# Altium PCB PCB2.PcbDoc
Units mm, origin at the board's own origin, x right, y up, seen from the top; angles counter-clockwise.
Board outline 50.13 x 61.13 mm, 2 copper layers (Top Layer, Bottom Layer); 14 components, 35 nets, 84 pads, 0 vias.
Unrouted connection lines stored in the file: 39.
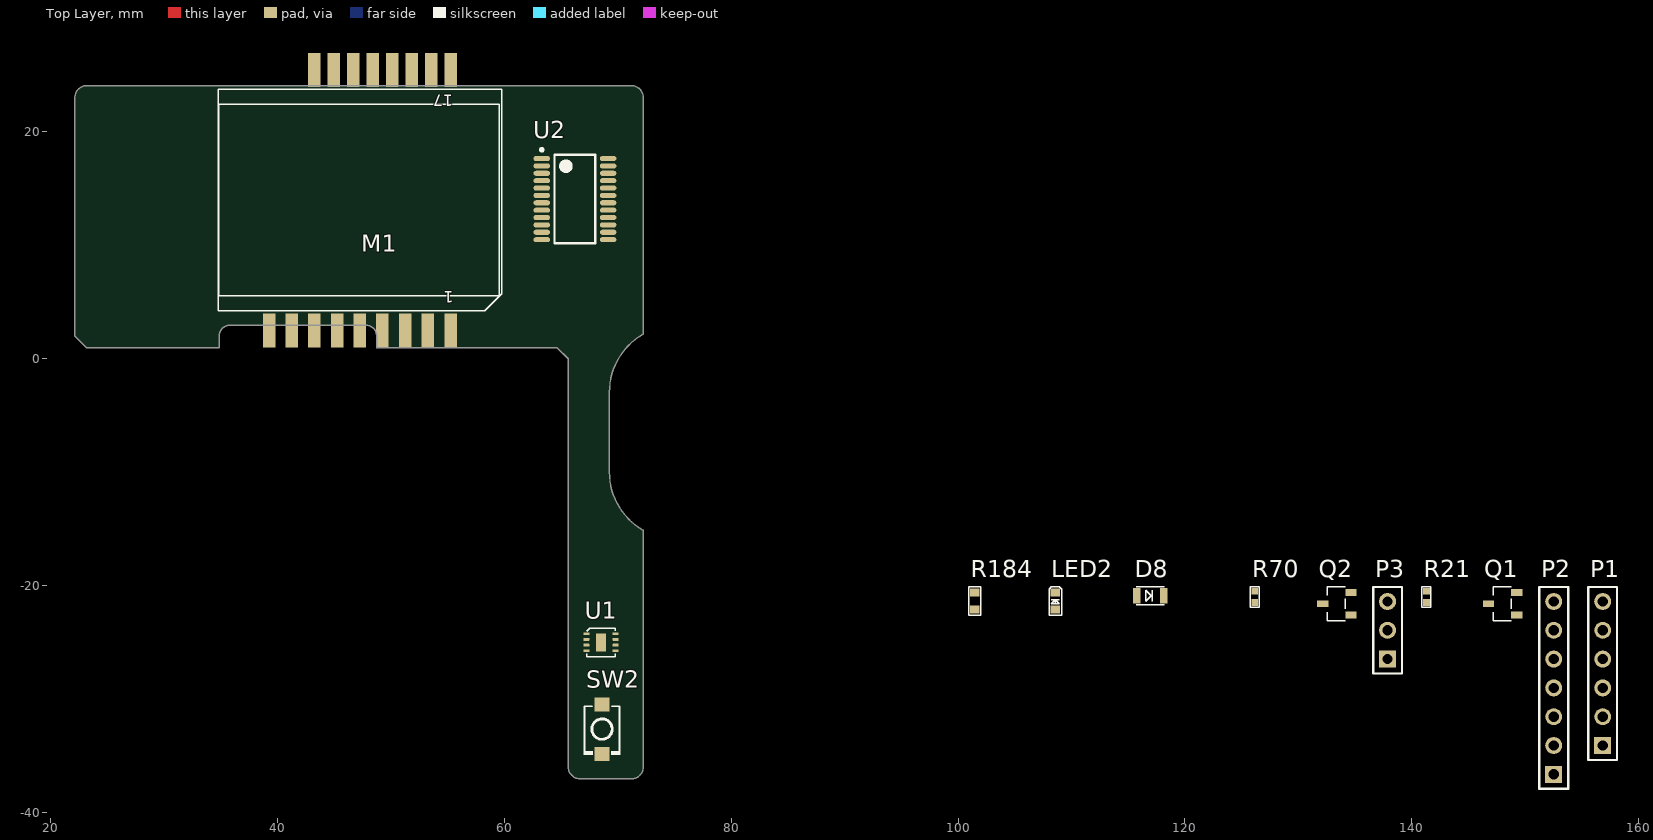
[diagram p0: Top Layer view]
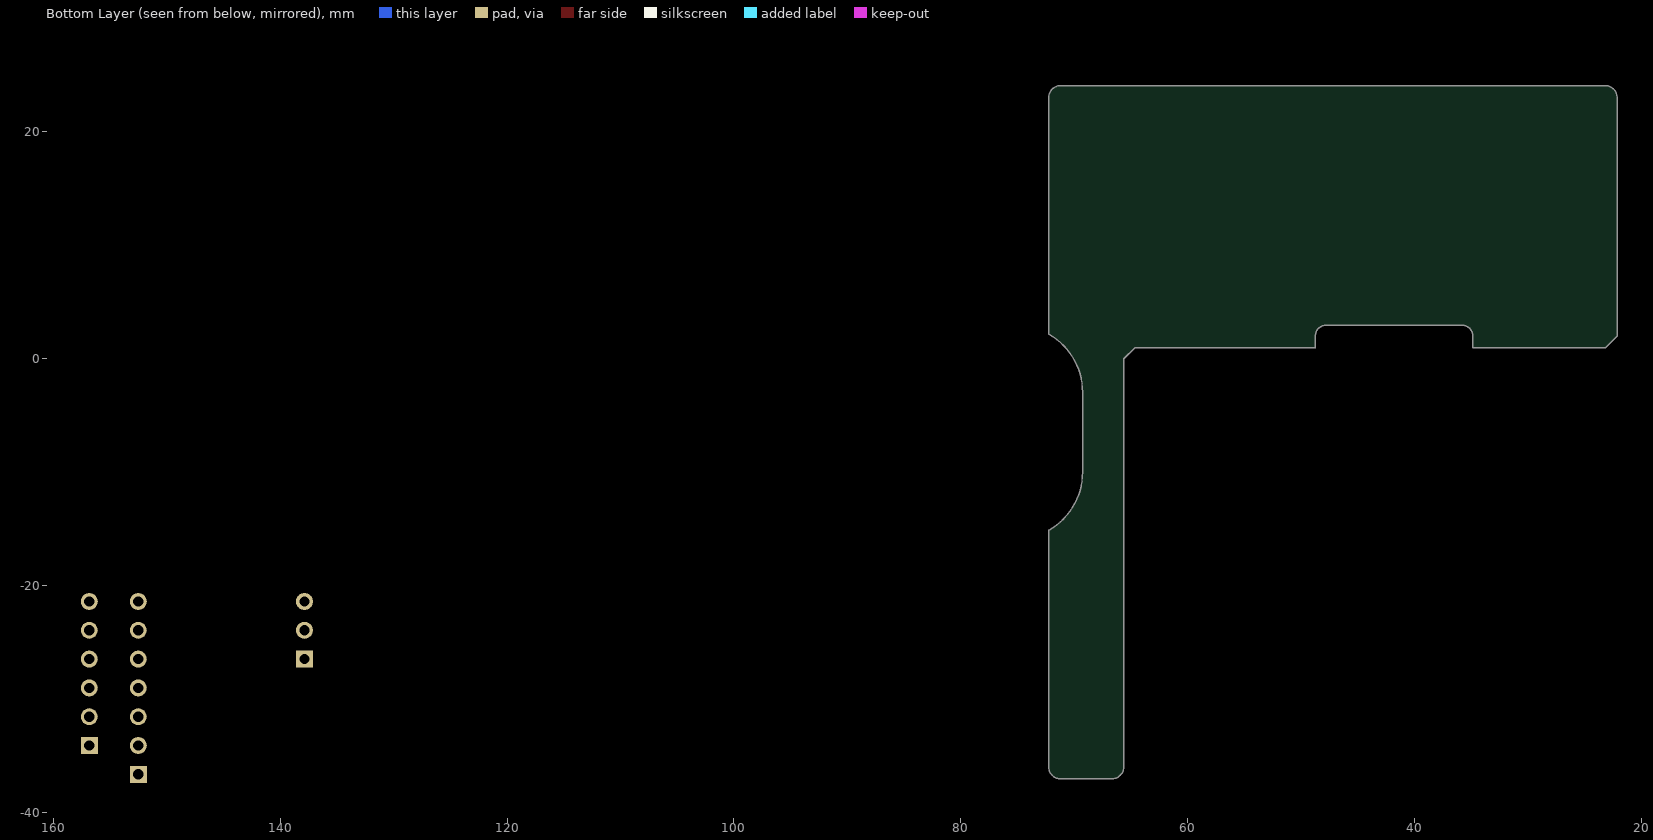
[diagram p1: Bottom Layer view, seen from below]

## Layer stack, top to bottom
Top Layer: signal copper 0.0356
Dielectric: dielectric 0.32, FR-4, Dk 4.8
Bottom Layer: signal copper 0.0356

## Board outline
23.14,0.947 ccw(c23.187,0.991) 23.189,0.927 34.784,0.927 ccw(c34.787,0.991) 34.851,0.991 34.851,1.991 cw(c35.787,1.991) 35.785,2.927 cw(c35.787,1.991) 35.787,2.927 47.787,2.927 cw(c47.787,1.991) 47.789,2.927 cw(c47.787,2.991) 47.784,2.927 47.789,2.927 cw(c47.787,1.991) 48.723,1.991 48.723,0.991 ccw(c48.787,0.991) 48.789,0.927 64.66,0.927 65.623,-0.036 65.623,-36.009 ccw(c66.687,-36.009) 66.684,-37.073 ccw(c66.687,-36.009) 66.687,-37.073 71.187,-37.073 ccw(c71.187,-36.009) 71.189,-37.073 ccw(c71.187,-36.009) 72.251,-36.009 72.251,-15.205 ccw(c72.187,-15.205) 72.218,-15.15 ccw(c75.187,-10.009) 72.219,-15.15 72.218,-15.15 cw(c75.187,-10.009) 69.251,-10.009 69.251,-3.009 cw(c75.187,-3.009) 72.217,2.131 ccw(c72.187,2.187) 72.251,2.187 72.251,22.991 ccw(c71.187,22.991) 71.187,24.055 23.187,24.055 ccw(c23.187,22.991) 22.123,22.991 22.123,1.991 ccw(c22.187,1.991) 22.143,1.944 22.142,1.946

## Design rules (kind name [scope] priority, off if disabled: settings)
Clearance [All] p1: gap=0.254
PolygonConnect [All] p1: connectstyle=Relief reliefconductorwidth=0.254 reliefentries=4 polygonreliefangle="90 Angle"
RoutingVias [All] p1: holewidth=0.711 width=1.27 viastyle="Through Hole" minholewidth=0.711 minwidth=1.27 maxholewidth=0.711 maxwidth=1.27
SilkscreenOverComponentPads [All] p1: minsilkscreentomaskgap=0.254
SolderMaskExpansion [All] p1: expansion=0.102
Width [All] p1: maxlimit=0.254 minlimit=0.254 preferedwidth=0.254
27 further rules are at their usual default settings.

## Components (designator, comment, footprint, x,y, rotation, side; value= is the part's Value field where it differs from the comment)
D8 "CESDB5V0D3" SOD323 115.748,-20.93 r0 top
LED2 "5V" 0603LED 108.585,-22.149 r90 top
M1 "YR-90823A" YR-90823A 55.245,2.438 r180 top
P1 "Header 6" HDR1X6 156.845,-34.138 r90 top
P2 "Header 7" HDR1X7 152.527,-36.678 r90 top
P3 "Header 3" HDR1X3 137.871,-26.518 r90 top
Q1 "NPN BCE_2" SOT23-3 149.276,-22.631 r0 top
Q2 "NPN BCE_2" SOT23-3 134.645,-22.631 r0 top
R21 "RESISTOR_0" 0402R 141.3,-21.539 r90 top
R70 "RESISTOR_0" 0402R 126.162,-21.539 r90 top
R184 "1K" 0603R 101.473,-22.149 r90 top
SW2 "SW PUSHBUTTON" SW-SMD_L3.9-W3.0-P4.45 68.605,-32.69 r270 top
U1 "SHT30" sh30 68.504,-25.044 r0 top
U2 "HT16C21A-24SOP" SOP65P640X265-24N 66.218,14.046 r0 top

## Footprints (in the part's own frame and the unit in brackets; to place one, negate y for a bottom-side part, rotate by r counter-clockwise, add the part's x,y. Pads: shape width x height; smd on the part's side, far side on the other; paste and mask are expansions set on the pad)
0402R [mm]
  rect 0.6x0.6 smd: 1(0,0) 2(1,0)
  silkscreen extent -0.4,-0.4 1.4,0.4
0603LED [mm]
  rect 0.7x0.85 smd: 1(0,0) 2(1.5,0)
  silkscreen extent -0.5,-0.55 2,0.55
0603R [mm]
  rect 0.7x0.85 smd: 1(0,0) 2(1.5,0)
  silkscreen extent -0.5,-0.55 2,0.55
HDR1X3 [mm] "Connector; Header; 3 Position"
  rect 1.5x1.5 hole 0.9: 1(0,0)
  round 1.5 hole 0.9: 2(2.54,0) 3(5.08,0)
  silkscreen extent -1.27,-1.27 6.35,1.27
HDR1X6 [mm] "Connector; Header; 6 Position"
  rect 1.5x1.5 hole 0.9: 1(0,0)
  round 1.5 hole 0.9: 2(2.54,0) 3(5.08,0) 4(7.62,0) 5(10.16,0) 6(12.7,0)
  silkscreen extent -1.27,-1.27 13.97,1.27
HDR1X7 [mm] "Connector; Header; 7 Position"
  rect 1.5x1.5 hole 0.9: 1(0,0)
  round 1.5 hole 0.9: 2(2.54,0) 3(5.08,0) 4(7.62,0) 5(10.16,0) 6(12.7,0) 7(15.24,0)
  silkscreen extent -1.27,-1.27 16.51,1.27
sh30 [mm]
  rrect50% 0.55x0.25 smd: 1(-1.275,0.762) 2(-1.275,0.262) 3(-1.275,-0.238) 4(-1.275,-0.738) 5(1.3,-0.738) 6(1.3,-0.238) 7(1.3,0.262) 8(1.3,0.762)
  rect 0.9x1.6 smd: 9(0,0)
  silkscreen extent -1.25,-1.25 1.25,1.25
SOD323 [mm]
  rect 0.65x1.35 smd: 1(0,0) 2(2.4,0)
  silkscreen extent -0.03,-0.8 2.44,0.8
SOP65P640X265-24N [mm] "SOP, 24-Leads, Body 7.8x4.4mm (max), Pitch 0.65mm, IPC Medium Density"
  oval 1.45x0.45 smd: 1(-2.925,3.575) 2(-2.925,2.925) 3(-2.925,2.275) 4(-2.925,1.625) 5(-2.925,0.975) 6(-2.925,0.325) 7(-2.925,-0.325) 8(-2.925,-0.975) 9(-2.925,-1.625) 10(-2.925,-2.275) 11(-2.925,-2.925) 12(-2.925,-3.575) 13(2.925,-3.575) 14(2.925,-2.925) 15(2.925,-2.275) 16(2.925,-1.625) 17(2.925,-0.975) 18(2.925,-0.325) 19(2.925,0.325) 20(2.925,0.975) 21(2.925,1.625) 22(2.925,2.275) 23(2.925,2.925) 24(2.925,3.575)
  silkscreen extent -3.05,-3.9 1.8,4.47, body extent -2.2,-3.9 2.2,3.9, height 2.65
SOT23-3 [mm]
  rect 1x0.6 smd: 1(0,0) 2(0,2) 3(-2.5,1)
  silkscreen extent -2.1,-0.5 -0.5,2.5
SW-SMD_L3.9-W3.0-P4.45 [mm]
  rect 1.23x1.36 smd: 1(-2.185,0) 2(2.185,0)
  silkscreen extent -2.03,-1.62 2.25,1.62
YR-90823A [mm]
  rect 1.1x3 smd: 1(0,0) 2(2,0) 3(4,0) 4(6,0) 5(8,0) 6(10,0) 7(12,0) 8(14,0) 9(16,0) 10(12,-23) 11(10.286,-23) 12(8.571,-23) 13(6.857,-23) 14(5.143,-23) 15(3.429,-23) 16(1.714,-23) 17(0,-23)
  silkscreen extent -4.5,-21.29 20.5,-1.75

## Part data
D8: library part "DIODE S", "Schottky Diode"
LED2: library part LED
P1: "Header, 6-Pin"
P2: "Header, 7-Pin"
P3: "Header, 3-Pin"
R184: library part R, "R"

## Nets (pads, with @x,y where several pads share a name; then routed paths per layer and width w, separated by ;. In a path a pad name is that pad's centre, name@x,y a point inside that pad or via, vN(x,y) a via of type N, cw(c..) or ccw(c..) an arc to the next point about the centre after c; other vN are vias at no path point)
COM0: M1.1 U2.5
COM1: M1.2 U2.6
COM2: M1.3 U2.7
COM3: M1.4 U2.8
DTR: P1.3 Q2.2 R21.1
EN: P3.3 Q1.3
GND: D8.1 LED2.2 P1.6 P2.2 P3.2 SW2.1 U1.7 U1.8 U2.4
I2C_SCL: P2.4 U1.4
I2C_SDA: P2.3 U1.1
IO0: P3.1 Q2.3
KEY: P2.7 R70.2
LCD_I2C_SCL: P2.6
LCD_I2C_SDA: P2.5
NetD8_2: D8.2 R70.1 SW2.2
NetLED2_1: LED2.1 R184.1
NetQ1_1: Q1.1 R21.2
NetQ2_1: Q2.1
RTS: Q1.2
RXD0: P1.2
SEG1: M1.5 U2.9
SEG2: M1.6 U2.10
SEG3: M1.7 U2.11
SEG4: M1.8 U2.12
SEG5: M1.9 U2.13
SEG6: M1.10 U2.14
SEG7: M1.11 U2.15
SEG8: M1.12 U2.16
SEG9: M1.13 U2.17
SEG10: M1.14 U2.18
SEG11: M1.15 U2.19
SEG12: M1.16 U2.20
SEG13: M1.17 U2.21
TXD0: P1.1
VBUS: P1.5
VDD33: P2.1 R184.2 U1.5 U2.1
pads on no net: P1.4 U1.2 U1.3 U1.6 U1.9 U2.2 U2.3 U2.22 U2.23 U2.24

## Silkscreen, mask and mechanical layers (free items; w line width, h text height)
Top Overlay:
  lines w0.127: 34.817,5.521 34.817,22.421 59.557,22.421 59.557,5.521 34.817,5.521
Mechanical 1:
  drawing of 205 lines, arcs and shapes, not listed
  text "50.00" at 49.516,183.338 h2.5
  text "1.50" at 131.17,177.43 h2.5
  text "24.74" at 49.016,176.639 h2.5
  text "16.90" at 29.7,158.695 h2.5
  text "23.00" at 13.797,157.215 h2.5
  text "61.00" at 84.642,138.215 h2.5
  text "1.60" at 134.268,99.839 h2.5
  text "4.60" at 18.557,61.454 h2.5
  text "50.00" at 43.687,37.365 h2.5
  text "24.74" at 43.187,30.665 h2.5
  text "16.90" at 23.87,12.721 h2.5
  text "23.00" at 7.968,11.241 h2.5
  text "61.00" at 78.813,-7.759 h2.5
Mechanical 22:
  lines w0.127: 40.646,67.803 40.646,67.803 ; 40.646,67.803 40.646,69.303 ; 40.646,67.803 65.386,67.803 ; 40.646,69.303 40.646,69.303 ; 40.646,69.303 65.386,69.303 ; 65.386,67.803 65.386,67.803 ; 65.386,67.803 65.386,69.303 ; 65.386,69.303 65.386,69.303 ; 264.387,153.249 276.337,160.148 ; 264.387,153.249 264.387,154.474 ; 264.387,153.249 281.881,143.149 ; 264.387,154.474 276.337,161.373 ; 264.387,154.474 281.881,144.374 ; 276.337,160.148 276.337,161.373 ; 276.337,160.148 293.831,150.048 ; 276.337,161.373 293.831,151.273 ; 281.881,143.149 293.831,150.048 ; 281.881,143.149 281.881,144.374 ; 281.881,144.374 293.831,151.273 ; 293.831,150.048 293.831,151.273 ; 40.646,151.495 40.646,168.395 65.386,168.395 65.386,151.495 40.646,151.495 ; 125.579,151.495 125.58,168.395 127.08,168.395 127.079,151.495 125.579,151.495
Mechanical 24:
  lines w0.127: 29.016,64.703 29.016,66.303 ; 29.016,169.965 29.016,169.965 ; 40.616,64.703 40.616,66.303 ; 41.616,64.703 41.616,66.303 ; 53.616,64.703 53.616,66.303 ; 54.616,64.703 54.616,66.303 ; 70.516,64.703 70.516,66.303 ; 71.516,66.303 71.516,66.304 71.516,64.704 ; 72.516,64.704 72.516,66.304 ; 75.016,66.304 75.016,64.703 78.016,64.703 78.016,64.704 ; 77.016,64.703 77.016,64.704 77.016,66.304 ; 77.016,169.965 77.016,169.965 ; 128.578,109.965 130.178,109.965 ; 128.579,130.769 130.179,130.769 ; 128.579,135.965 130.179,135.965 ; 128.579,142.965 130.179,142.965 ; 128.579,145.965 130.179,145.965 ; 128.579,146.965 130.179,146.965 ; 128.579,147.965 130.179,147.965 ; 128.579,148.161 130.179,148.161 ; 128.579,148.965 130.179,148.965 ; 128.58,168.965 130.18,168.965 ; 252.96,154.433 267.809,163.006 267.809,164.312 252.96,155.739 252.96,153.616 261.162,148.881 ; 252.96,154.923 261.162,150.187 ; 256.556,120.753 256.556,122.059 ; 256.849,121.161 282.305,135.858 282.305,137.164 ; 271.769,144.39 271.345,144.635 263.284,149.289 263.284,150.595 271.769,145.696 271.769,144.88 ; 272.062,143.982 272.062,145.288 ; 275.951,129.203 275.951,127.897 cw(c277.989,127.895) 276.003,128.35 cw(c278.117,127.865) 276.06,128.553 ; 282.305,136.674 281.881,136.919 271.062,143.165 ; 303.164,143.41 269.223,163.006 269.223,164.312 275.326,160.789 293.831,150.106 303.164,144.717 303.164,143.9 ; 303.457,143.002 303.457,144.308 ; 28.016,64.703 28.016,66.303 78.016,66.304 ; 28.016,64.703 28.016,64.703 ; 28.016,64.703 78.016,64.704 ; 28.016,147.965 28.016,147.965 ; 28.016,147.965 28.016,168.965 ; 28.016,147.965 29.016,146.965 ; 28.016,168.965 cw(c29.016,168.965) 29.016,169.965 ; 28.016,168.965 28.016,168.965 ; 29.016,146.965 29.016,146.965 ; 29.016,146.965 40.616,146.965 ; 29.016,169.965 77.016,169.965 ; 40.616,146.965 40.616,146.965 ; 40.616,146.965 40.616,147.965 ; 40.616,147.965 cw(c41.616,147.965) 41.616,148.965 ; 40.616,147.965 40.616,147.965 ; 41.616,148.965 41.616,148.965 ; 41.616,148.965 53.616,148.965 ; 53.616,148.965 cw(c53.616,147.965) 54.616,147.965 ; 53.616,148.965 53.616,148.965 ; 54.616,146.965 54.616,147.965 ; 54.616,146.965 54.616,146.965 ; 54.616,146.965 70.516,146.965 ; 54.616,147.965 54.616,147.965 ; 70.516,146.965 70.516,146.965 ; 70.516,146.965 71.516,145.965 ; 71.516,64.703 71.516,64.704 ; 71.516,109.965 ccw(c72.516,109.965) 72.516,108.965 ; 71.516,109.965 71.516,145.965 ; 71.516,109.965 71.516,109.965 ; 71.516,145.965 71.516,145.965 ; 72.516,108.965 77.016,108.965 ; 72.516,108.965 72.516,108.965 ; 75.016,135.965 ccw(c81.016,135.965) 78.016,130.769 ; 75.016,135.965 75.016,135.965 ; 75.016,135.965 75.016,142.965 ; 75.016,142.965 cw(c81.016,142.965) 78.016,148.161 ; 75.016,142.965 75.016,142.965 ; 77.016,108.965 ccw(c77.016,109.965) 78.016,109.965 ; 77.016,108.965 77.016,108.965 ; 77.016,169.965 cw(c77.016,168.965) 78.016,168.965 ; 78.016,64.704 78.016,66.304 ; 78.016,66.304 78.016,66.304 ; 78.016,109.965 78.016,130.769 ; 78.016,109.965 78.016,109.965 ; 78.016,130.769 78.016,130.769 ; 78.016,148.161 78.016,168.965 ; 78.016,148.161 78.016,148.161 ; 78.016,168.965 78.016,168.965 ; 256.849,121.651 260.031,119.814 260.031,118.507 256.849,120.345 256.849,121.651 ; 256.849,121.651 256.849,122.467 282.305,137.164 ; 261.162,148.881 261.869,149.289 261.869,150.595 261.162,150.187 ; 261.162,148.881 261.162,150.187 ; 271.062,143.165 271.769,143.574 271.769,144.88 ; 271.062,143.165 271.062,144.472 ; 271.062,144.472 271.769,144.88 ; 271.062,144.472 282.305,137.981 282.305,137.164 ; 303.164,143.9 288.454,135.407 288.454,134.101 303.164,142.594 303.164,143.9 ; 128.578,108.965 130.178,108.965 130.18,169.965 128.58,169.965 128.578,108.965 ; 261.445,118.507 261.445,119.814 276.156,128.307 276.156,127 261.445,118.507 ; 277.709,130.347 282.658,133.204 282.658,134.511 277.709,131.653 277.709,130.347
Mechanical 30:
  circle w0.064: c40.646,168.395 r0.032
  circle w0.064: c65.386,168.395 r0.032
  circle w0.064: c65.386,177.889 r0.032
  circle w0.064: c40.646,168.395 r0.032
  circle w0.064: c40.646,151.495 r0.032
  circle w0.064: c33.2,151.495 r0.032
  circle w0.064: c29.016,146.965 r0.032
  circle w0.064: c29.016,169.965 r0.032
  circle w0.064: c17.464,169.965 r0.032
  circle w0.064: c78.016,168.965 r0.032
  circle w0.064: c28.016,168.965 r0.032
  circle w0.064: c28.016,184.588 r0.032
  circle w0.064: c128.578,108.965 r0.032
  circle w0.064: c130.178,108.965 r0.032
  circle w0.064: c130.178,101.089 r0.032
  circle w0.064: c125.58,168.395 r0.032
  circle w0.064: c127.08,168.395 r0.032
  circle w0.064: c127.08,178.68 r0.032
  circle w0.064: c77.016,108.965 r0.032
  circle w0.064: c77.016,169.965 r0.032
  circle w0.064: c87.976,169.965 r0.032
  circle w0.064: c40.646,69.303 r0.032
  circle w0.064: c40.616,64.704 r0.032
  circle w0.064: c26.314,64.704 r0.032
  circle w0.064: c82.146,23.991 r0.032
  circle w0.064: c71.187,23.991 r0.032
  circle w0.064: c71.187,-37.009 r0.032
  circle w0.064: c22.187,38.615 r0.032
  circle w0.064: c22.187,22.991 r0.032
  circle w0.064: c72.187,22.991 r0.032
  circle w0.064: c11.634,23.991 r0.032
  circle w0.064: c23.187,23.991 r0.032
  circle w0.064: c23.187,0.991 r0.032
  circle w0.064: c27.37,5.521 r0.032
  circle w0.064: c34.817,5.521 r0.032
  circle w0.064: c34.817,22.421 r0.032
  circle w0.064: c59.557,31.915 r0.032
  circle w0.064: c59.557,22.421 r0.032
  circle w0.064: c34.817,22.421 r0.032

## Text inside footprints (layer, text, board x,y; h text height)
M1: Top Overlay "17" at 55.499,23.241 h1.02 r180; Top Overlay "1" at 55.55,5.918 h1.02 r180